# Altium PCB SensWear-V1R2-Debug.PcbDoc (part 3 of 3)
Units mm, origin at the board's own origin, x right, y up, seen from the top; angles counter-clockwise.
Board outline 25 x 25 mm, 4 copper layers (Top, L2, L3, Bottom), stack 1.582 mm thick; 73 components, 63 nets, 295 pads, 106 vias.
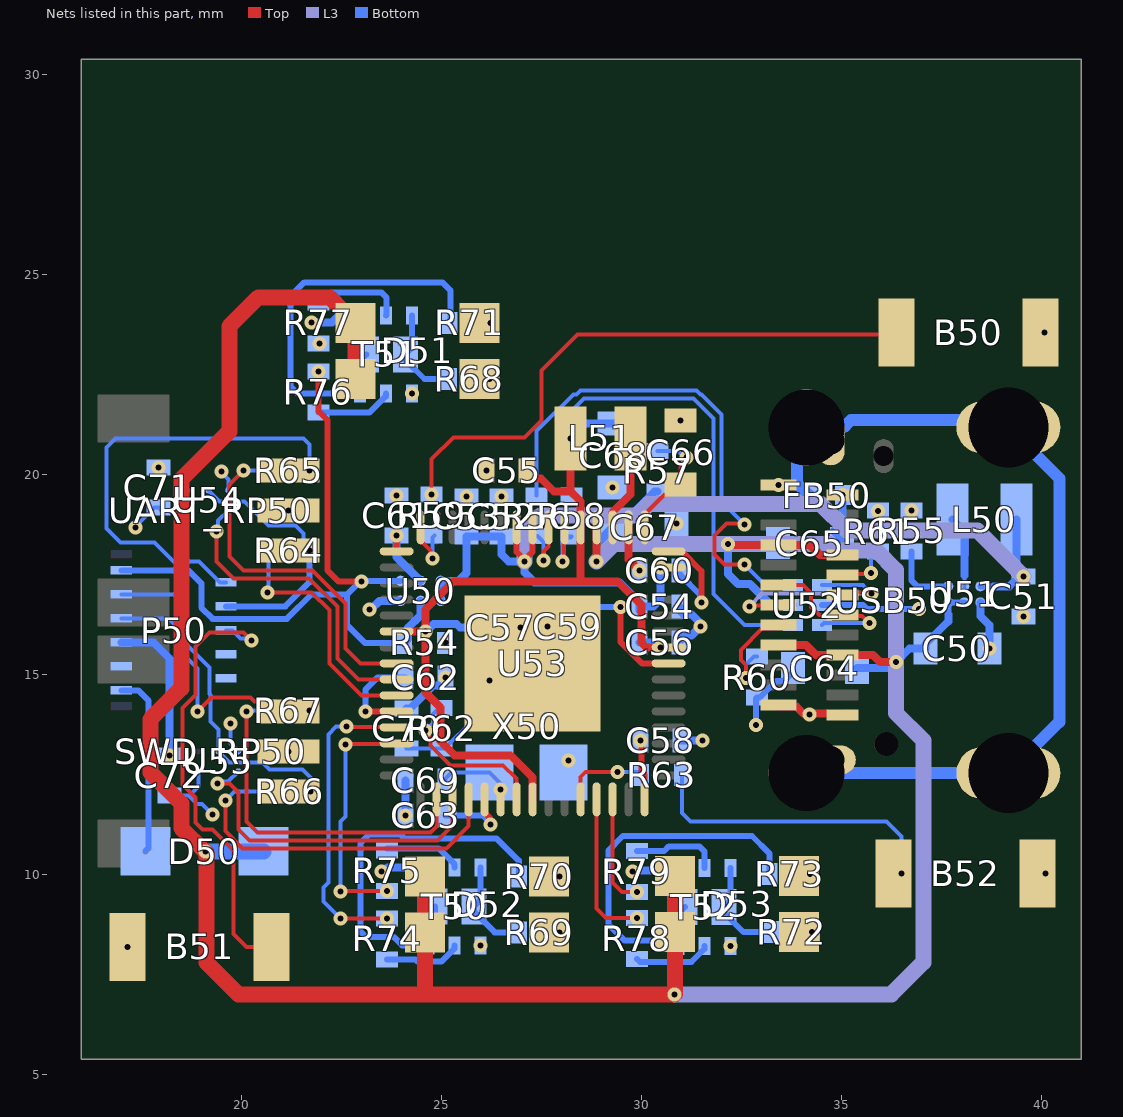
[diagram p4: the nets of this part, all layers, seen from the top]

## Part data (continued)
R59 R62 R63 R74 R75 R76 R77 R78 R79: library part ERJ-2RKF1001X, "RES SMD 1K OHM 1% 1/10W 0402", Manufacturer="Panasonic Electronic Components", Operating Temperature="-55°C ~ 155°C", Package / Case="0402 (1005 Metric)", Power (Watts)="0.1W, 1/10W", Resistance (Ohms)=1k, Supplier Device Package=0402, Supplier Part Number 1=P1.00KLDKR-ND, Temperature Coefficient=±100ppm/°C, Tolerance=±1%, Category=Resistors, ComponentLink1Description=https://industrial.panasonic.com/cdbs/www-data/pdf/RDA0000/AOA0000C283.pdf, ComponentLink1URL=https://industrial.panasonic.com/cdbs/www-data/pdf/RDA0000/AOA0000C283.pdf, Composition="Thick Film", Failure Rate=-, Features="Automotive AEC-Q200", Height - Seated (Max)="0.016\" (0.40mm)", Manufacturer Part Number=ERJ-2RKF1001X, Number of Terminations=2, Packaging=Digi-Reel®, Part Status=Active, Pricing 1="1=0.1, 10=0.025, 25=0.018, 50=0.0136, 100=0.01, 250=0.00764, 500=0.00612, 1000=0.00451, 5000=0.00323 (USD)", RoHS="RoHS Compliant", Size / Dimension="0.039\" L x 0.020\" W (1.00mm x 0.50mm)", Stock 1=5504027, Supplier 1=Digi-Key
R60 R61: library part ERJ-2RKF5101X, "RES SMD 5.1K OHM 1% 1/10W 0402", Case Code (Imperial)=0402, Case Code (Metric)=1005, Manufacturer=Panasonic, Max Operating Temperature=155°C, Max Power Dissipation=100mW, Min Operating Temperature=-55°C, Package Quantity=10000, Resistance Tolerance=1%, Resistor Type="Thick Film", Supplier Part Number=667-ERJ-2RKF5101X, Temperature Coefficient=100ppm/°C, Voltage Rating=50V, Case/Package=0402, Category="Chip SMD Resistors", ComponentLink1Description=https://datasheet.ciiva.com/11821/0900766b80f80784-11821351.pdf?src-supplier=Rs, ComponentLink1URL=https://datasheet.ciiva.com/11821/0900766b80f80784-11821351.pdf?src-supplier=Rs, ComponentLink2Description=https://datasheet.ciiva.com/43467/1678782-43467375.pdf?src-supplier=Farnell, ComponentLink2URL=https://datasheet.ciiva.com/43467/1678782-43467375.pdf?src-supplier=Farnell, ComponentLink3Description=https://datasheet.ciiva.com/16761/70260748-16761739.pdf?src-supplier=Allied+Electronics, ComponentLink3URL=https://datasheet.ciiva.com/16761/70260748-16761739.pdf?src-supplier=Allied+Electronics, ComponentLink4Description=https://datasheet.ciiva.com/16788/70260748-16788554.pdf?src-supplier=Allied+Electronics, ComponentLink4URL=https://datasheet.ciiva.com/16788/70260748-16788554.pdf?src-supplier=Allied+Electronics, ComponentLink5Description=https://datasheet.ciiva.com/9195/aoa0000ce2-9195580.pdf?src-supplier=Avnet, ComponentLink5URL=https://datasheet.ciiva.com/9195/aoa0000ce2-9195580.pdf?src-supplier=Avnet, Construction=Rectangular, Contact Plating=Tin, Depth=0.5mm, Height=0.35mm, Lead Free=5697LeadFree, Length=1mm, Manufacturer Part Number=ERJ-2RKF5101X, Military Standard=Not, Mounting Technology="Surface Mount", Number of Terminations=2, Packaging="Tape and Reel", Power Rating=100mW, Pricing="1=0.1, 10=0.016, 50=0.016, 100=0.009, 1000=0.007, 10000=0.004 (USD)", Reach SVHC Compliant=No, RoHS=Yes, RoHS Compliant=Yes, Series=ERJ, Stock=709989, Supplier=Mouser, Supplier 1=Mouser, Supplier Part Number 1=667-ERJ-2RKF5101X, Technology="THICK FILM", Termination=SMD/SMT, Tolerance=1%, Voltage Rating (DC)=50V, Weight=2.8E-05oz, Width=0.5mm
R64 R65 R66 R67: library part ERJ-2RKF1000X, "RES SMD 100 OHM 1% 1/10W 0402", Manufacturer="Panasonic Electronic Components", Operating Temperature="-55°C ~ 155°C", Package / Case="0402 (1005 Metric)", Power (Watts)="0.1W, 1/10W", Resistance (Ohms)=100, Supplier Device Package=0402, Supplier Part Number 1=P100LDKR-ND, Temperature Coefficient=±100ppm/°C, Tolerance=±1%, Category=Resistors, ComponentLink1Description=https://industrial.panasonic.com/cdbs/www-data/pdf/RDA0000/AOA0000C283.pdf, ComponentLink1URL=https://industrial.panasonic.com/cdbs/www-data/pdf/RDA0000/AOA0000C283.pdf, Composition="Thick Film", Failure Rate=-, Features="Automotive AEC-Q200", Height - Seated (Max)="0.016\" (0.40mm)", Manufacturer Part Number=ERJ-2RKF1000X, Number of Terminations=2, Packaging=Digi-Reel®, Part Status=Active, Pricing 1="1=0.1, 10=0.025, 25=0.018, 50=0.0136, 100=0.01, 250=0.00764, 500=0.00612, 1000=0.00451, 5000=0.00323 (USD)", RoHS="RoHS Compliant", Size / Dimension="0.039\" L x 0.020\" W (1.00mm x 0.50mm)", Stock 1=1714577, Supplier 1=Digi-Key
R68 R69 R70 R71 R72 R73: library part ERJ-2RKF6200X, "RES SMD 620 OHM 1% 1/10W 0402", Case Code (Imperial)=0402, Case Code (Metric)=1005, Manufacturer=Panasonic, Max Operating Temperature=155°C, Max Power Dissipation=100mW, Min Operating Temperature=-55°C, Package Quantity=10000, Resistance=620R, Supplier Part Number 1=P620LCT-ND, Temperature Coefficient=100ppm/°C, Tolerance=1%, Voltage Rating=50V, Case/Package=0402, ComponentLink1Description=https://datasheet.ciiva.com/11821/0900766b80f80784-11821345.pdf?src-supplier=RSComponents, ComponentLink1URL=https://datasheet.ciiva.com/11821/0900766b80f80784-11821345.pdf?src-supplier=RSComponents, ComponentLink2Description=https://datasheet.ciiva.com/46373/1678782-46373670.pdf?src-supplier=Element14, ComponentLink2URL=https://datasheet.ciiva.com/46373/1678782-46373670.pdf?src-supplier=Element14, ComponentLink3Description=https://datasheet.ciiva.com/46373/1678782-46373671.pdf?src-supplier=Element14, ComponentLink3URL=https://datasheet.ciiva.com/46373/1678782-46373671.pdf?src-supplier=Element14, ComponentLink4Description=https://datasheet.ciiva.com/22743/1678782-22743848.pdf?src-supplier=Farnell, ComponentLink4URL=https://datasheet.ciiva.com/22743/1678782-22743848.pdf?src-supplier=Farnell, ComponentLink5Description=https://datasheet.ciiva.com/7711/1678782-7711049.pdf?src-supplier=Element14, ComponentLink5URL=https://datasheet.ciiva.com/7711/1678782-7711049.pdf?src-supplier=Element14, ComponentLink6Description=https://datasheet.ciiva.com/16773/70260748-16773113.pdf?src-supplier=Allied+Electronics, ComponentLink6URL=https://datasheet.ciiva.com/16773/70260748-16773113.pdf?src-supplier=Allied+Electronics, ComponentLink7Description=https://datasheet.ciiva.com/30264/aoa0000ce2-30264139.pdf?src-supplier=Onlinecomponents.com, ComponentLink7URL=https://datasheet.ciiva.com/30264/aoa0000ce2-30264139.pdf?src-supplier=Onlinecomponents.com, ComponentLink8Description=https://datasheet.ciiva.com/22681/1678782-22681676.pdf?src-supplier=Element14, ComponentLink8URL=https://datasheet.ciiva.com/22681/1678782-22681676.pdf?src-supplier=Element14, ComponentLink9Description=https://datasheet.ciiva.com/43467/1678782-43467292.pdf?src-supplier=Farnell, ComponentLink9URL=https://datasheet.ciiva.com/43467/1678782-43467292.pdf?src-supplier=Farnell, ComponentLink10Description=https://datasheet.ciiva.com/24159/aoa0000ce2-24159919.pdf?src-supplier=Mouser, ComponentLink10URL=https://datasheet.ciiva.com/24159/aoa0000ce2-24159919.pdf?src-supplier=Mouser, ComponentLink11Description=https://datasheet.ciiva.com/28577/1694929-28577711.pdf?src-supplier=Element14, ComponentLink11URL=https://datasheet.ciiva.com/28577/1694929-28577711.pdf?src-supplier=Element14, Composition="Thick Film", Contact Plating=Tin, Depth=0.5mm, Features="Automotive AEC-Q200", Height=0.35mm, Lead Free="Lead Free", Length=1mm, Manufacturer Part Number=ERJ-2RKF6200X, Military Standard=Not, Mount="Surface Mount", Number of Terminations=2, Packaging="Tape and Reel", Power Rating=100mW, Pricing 1="1 = 0.10000, 10 = 0.04500, 100 = 0.01830, 1000 = 0.00823, 2500 = 0.00715, 5000 = 0.00590 (USD)", REACH SVHC="No SVHC", RoHS=Yes, Stock 1=3402, Supplier 1=Digi-Key, Termination=SMD/SMT, Voltage Rating (DC)=50V, Weight=2.8E-05oz, Width=0.02inch
SWD_RP50 UART_RP50: "Male Header, Pitch 1 mm, 1 x 3 Position, Height 2.9 mm, -25 to 85 degC, RoHS, Tape and Reel", Manufacturer=JST, Package Description="Male Header, Pitch 1 mm, 1 x 3 Position, Height 2.9 mm", Package Reference=SM03B-SRSS-TB, Supplier Part Number 1=306-SM03BSRSSTBLFSNP, Datasheet URL=https://datasheet.ciiva.com/26894/getdatasheetpartid-708885-26894671.pdf, Datasheet Version=11/2010, Manufacturer URL=http://www.jst.com/home2.html, Mounting Technology=SurfaceMount, No of Positions=3, Pitch=1mm, Style/Orientation=RightAngleHeader/Plug, Supplier 1=Mouser, Termination=Crimp, Type=ShroudedHeader
T50 T51 T52: "Transistor MOSFET Array Dual N-CH 30V 5A 6-Pin WSON T/R", Continuous Drain Current (ID)=5A, Drain to Source Breakdown Voltage=30V, Drain to Source Resistance=27mΩ, Gate to Source Voltage (Vgs)=20V, Input Capacitance=353pF, Manufacturer="Texas Instruments", Manufacturer Lifecycle Status=ACTIVE, Max Junction Temperature (Tj)=150°C, Max Power Dissipation=2.3W, Min Operating Temperature=-55°C, Supplier Part Number=296-48123-1-ND, Category=MOSFETs, ComponentLink1Description=https://octopart.com:443/opatz8j6/c1?t=jYUYnSIbX3JPF1ppKMk94jqLtnau3o2NkWkpxZkVqshdsPn2Xnsvg0CJDB2kaMHx6WQztfzcG0OekiWwH8J70MlJcI-durRh-GJOHOOmtd0RYM7KAe0wYEmFuAjLdnVjgqQAc6gT_hdsjRctdgH-iPW_2Oueiud6o-NrKtiJndFloCa3B1i_RQfED1okSLG4Xw8I11rLNwbzJXAm6ZYaBzMeR__geF93AX8ENApcPsw-JHHu80pvtQpIKkben9NFycDOxZ9-SIDOejWvJQ5QoARsnRm2j0JEHlnaXI5po2wZZsSibe2fDTedVPkJBoOEn9-npMFdctWhFQ_C1ahfTUFKBVMfUu-NE6M6aEw9sB_0tPZyMRgjg1CcOD-TVVJMv-7K8DIbU7U&src-supplier=Texas+Instruments, ComponentLink1URL=https://octopart.com:443/opatz8j6/c1?t=jYUYnSIbX3JPF1ppKMk94jqLtnau3o2NkWkpxZkVqshdsPn2Xnsvg0CJDB2kaMHx6WQztfzcG0OekiWwH8J70MlJcI-durRh-GJOHOOmtd0RYM7KAe0wYEmFuAjLdnVjgqQAc6gT_hdsjRctdgH-iPW_2Oueiud6o-NrKtiJndFloCa3B1i_RQfED1okSLG4Xw8I11rLNwbzJXAm6ZYaBzMeR__geF93AX8ENApcPsw-JHHu80pvtQpIKkben9NFycDOxZ9-SIDOejWvJQ5QoARsnRm2j0JEHlnaXI5po2wZZsSibe2fDTedVPkJBoOEn9-npMFdctWhFQ_C1ahfTUFKBVMfUu-NE6M6aEw9sB_0tPZyMRgjg1CcOD-TVVJMv-7K8DIbU7U&src-supplier=Texas+Instruments, ComponentLink2Description=https://datasheet.octopart.com:443/CSD87502Q2-Texas-Instruments-datasheet-61500092.pdf?src-supplier=Texas+Instruments, ComponentLink2URL=https://datasheet.octopart.com:443/CSD87502Q2-Texas-Instruments-datasheet-61500092.pdf?src-supplier=Texas+Instruments, ComponentLink3Description=https://datasheet.octopart.com:443/CSD87502Q2-Texas-Instruments-datasheet-153476664.pdf?src-supplier=Augswan, ComponentLink3URL=https://datasheet.octopart.com:443/CSD87502Q2-Texas-Instruments-datasheet-153476664.pdf?src-supplier=Augswan, ComponentLink4Description=https://datasheet.octopart.com:443/CSD87502Q2-Texas-Instruments-datasheet-169738626.pdf?src-supplier=LCSC, ComponentLink4URL=https://datasheet.octopart.com:443/CSD87502Q2-Texas-Instruments-datasheet-169738626.pdf?src-supplier=LCSC, ComponentLink5Description=http://sigma.octopart.com:80/reach_statement/Texas-Instruments-company-64.pdf?src-supplier=Compliance+Statements, ComponentLink5URL=http://sigma.octopart.com:80/reach_statement/Texas-Instruments-company-64.pdf?src-supplier=Compliance+Statements, ComponentLink6Description=http://sigma.octopart.com:80/conflict_mineral_statement/Texas-Instruments-company-63.pdf?src-supplier=Compliance+Statements, ComponentLink6URL=http://sigma.octopart.com:80/conflict_mineral_statement/Texas-Instruments-company-63.pdf?src-supplier=Compliance+Statements, Drain to Source Voltage (Vdss)=30V, Element Configuration=Dual, Height=800µm, Lead Free="Lead Free", Length=2mm, Lifecycle Status=Production, Manufacturer Part Number=CSD87502Q2, Max Operating Temperature=150°C, Mounting Technology="Surface Mount", Number of Channels=2, Packaging="Tape & Reel (TR)", Pins=6, Power Dissipation=2.3W, Pricing="1=0.51, 10=0.36, 25=0.3216, 100=0.2796, 250=0.25944, 500=0.24728, 1000=0.2373 (USD)", Rds On Max=32.4mΩ, RoHS=Compliant, Stock=34703, Supplier=DigiKey, Supplier 1=DigiKey, Supplier Part Number 1=296-48123-1-ND, Thickness=750µm, Turn-Off Delay Time=12ns, Turn-On Delay Time=3ns, Width=2mm
U50: "IC ADVANCED POWER SWITCH 6WLCSP", Current Limit=1.5A, Manufacturer="Fairchild Semiconductor", Operating Temperature="-40°C ~ 85°C", Package / Case="6-UFBGA, WLCSP", Supplier Device Package=6-WLCSP, Supplier Part Number 1=FPF1320UCXDKR-ND, Voltage - Input="1.5 V ~ 5.5 V", Category="Integrated Circuits (ICs)", ComponentLink1Description=http://www.fairchildsemi.com/ds/FP/FPF1320.pdf, ComponentLink1URL=http://www.fairchildsemi.com/ds/FP/FPF1320.pdf, Internal Switch(s)=Yes, Manufacturer Part Number=FPF1320UCX, Mounting Type="Surface Mount", Number of Outputs=1, Packaging=Digi-Reel®, Pricing 1="1=0.73, 10=0.636, 25=0.562, 100=0.4896, 250=0.42616, 500=0.36278, 1000=0.29057 (EUR)", Rds (On)="60 mOhm", RoHS="RoHS Compliant", Stock 1=1622, Supplier 1=Digi-Key, Type="High Side Switch"
U51: "Conv DC-DC 1.8V to 6.5V Synchronous Step Down Single-Out 1.8V to 3.3V 0.75A 6-Pin DSBGA T/R", Manufacturer="Texas Instruments", Supplier Part Number=595-TPS62840YBGR, Category="Voltage Regulators - Switching", Manufacturer Part Number=TPS62840YBGR, Pricing="1=1,97, 10=1,77, 50=1,77, 100=1,42, 1000=0,972, 10000=0,865 (USD)", RoHS=Yes, Stock=2271, Supplier=Mouser, Supplier 1=Mouser, Supplier Part Number 1=595-TPS62840YBGR
U52: library part PRTR5V0U2F,115, "TVS DIODE 5.5VWM SOT886", Capacitance @ Frequency="1pF @ 1MHz", Current - Peak Pulse (10/1000µs)=-, Manufacturer="NXP Semiconductors", Operating Temperature="-40°C ~ 85°C (TA)", Package / Case=6-XFDFN, Power Line Protection=Yes, Supplier Device Package="6-XSON, SOT886 (1.45x1)", Supplier Part Number 1=568-4677-6-ND, Voltage - Breakdown (Min)=6V, Voltage - Reverse Standoff (Typ)="5.5V (Max)", Applications=Automotive, Bidirectional Channels=2, Category="Circuit Protection", ComponentLink1Description=http://www.nxp.com/documents/data_sheet/PRTR5V0U2F_PRTR5V0U2K.pdf, ComponentLink1URL=http://www.nxp.com/documents/data_sheet/PRTR5V0U2F_PRTR5V0U2K.pdf, Manufacturer Part Number=PRTR5V0U2F,115, Mounting Type="Surface Mount", Packaging=Digi-Reel®, Part Status=Active, Power - Peak Pulse=-, Pricing 1="1=0.38, 10=0.325, 100=0.2427, 500=0.19058, 1000=0.14693 (GBP)", RoHS="RoHS Compliant", Stock 1=51030, Supplier 1=DigiKey, Supplier 2=RS, Supplier Part Number 2=8166931, Type="Steering (Rail to Rail)", Unidirectional Channels=-, Voltage - Clamping (Max) @ Ipp=-
U54 U55: "Schmitt Trigger 32mA 1 1.65V~5.5V 32mA 1 BGA-5 Buffer/Driver/Transceiver ROHS", Case/Package=BGA, High Level Output Current=-32mA, Low Level Output Current=32mA, Manufacturer="Texas Instruments", Manufacturer Lifecycle Status=ACTIVE, Max Operating Temperature=125°C, Max Supply Voltage=5.5V, Min Operating Temperature=-40°C, Min Supply Voltage=1.65V, Operating Supply Voltage=3.3V, Quiescent Current=1.5µA, Supplier Part Number=296-SN74LVC1G17YZPRCT-ND, Category="Buffers, Drivers and Transceivers", ComponentLink1Description=https://sigma.octopart.com:443/82288934/technical_drawing/Texas-Instruments-SN74LVC1G17YZPR.pdf?src-supplier=Texas+Instruments, ComponentLink1URL=https://sigma.octopart.com:443/82288934/technical_drawing/Texas-Instruments-SN74LVC1G17YZPR.pdf?src-supplier=Texas+Instruments, ComponentLink2Description=https://octopart.com:443/opatz8j6/c1?t=PyRarBsQ05LdiDhXNvU2f3oOqG1-bb7WCxWCMaxFTmsOtBRs7KjqXNp5sK_2d0llqty9KOIOP86L9m9F78mSvRKYKo43feLMx4OdbDLm-cZoL3aN5xX_-495hjOu7brVzsSaJqe0eM_P8AhVpHi5puBlhKbIrFeSrOCwHxcHWgi5PnhRUKZWtBRbK-25zEuCk6Jfi-bdFYgzu2MWub_x0O3lvfea8XTq7PdaVle1BtMyJ7Nv0Q4WJJSTRfTQuvPxk3b1_s4PYKQPF9FomEyeEEj8XMVdl7f4NPzizzEWK0FpT5uVNEEH98wbQrCFEjl8Ci9lfXN94WXBbZAYDLWqKcgI-0_yVWRTKmhI7HVloxJ-RsHHV951LAIPonwWLS7kB55M7FxHmQ&src-supplier=Texas+Instruments, ComponentLink2URL=https://octopart.com:443/opatz8j6/c1?t=PyRarBsQ05LdiDhXNvU2f3oOqG1-bb7WCxWCMaxFTmsOtBRs7KjqXNp5sK_2d0llqty9KOIOP86L9m9F78mSvRKYKo43feLMx4OdbDLm-cZoL3aN5xX_-495hjOu7brVzsSaJqe0eM_P8AhVpHi5puBlhKbIrFeSrOCwHxcHWgi5PnhRUKZWtBRbK-25zEuCk6Jfi-bdFYgzu2MWub_x0O3lvfea8XTq7PdaVle1BtMyJ7Nv0Q4WJJSTRfTQuvPxk3b1_s4PYKQPF9FomEyeEEj8XMVdl7f4NPzizzEWK0FpT5uVNEEH98wbQrCFEjl8Ci9lfXN94WXBbZAYDLWqKcgI-0_yVWRTKmhI7HVloxJ-RsHHV951LAIPonwWLS7kB55M7FxHmQ&src-supplier=Texas+Instruments, ComponentLink3Description=https://datasheet.octopart.com:443/SN74LVC1G17YZPR-Texas-Instruments-datasheet-25356049.pdf?src-supplier=Texas+Instruments, ComponentLink3URL=https://datasheet.octopart.com:443/SN74LVC1G17YZPR-Texas-Instruments-datasheet-25356049.pdf?src-supplier=Texas+Instruments, ComponentLink4Description=https://sigma.octopart.com:443/49258429/technical_drawing/Texas-Instruments-SN74LVC1G17YZPR.pdf?src-supplier=Texas+Instruments, ComponentLink4URL=https://sigma.octopart.com:443/49258429/technical_drawing/Texas-Instruments-SN74LVC1G17YZPR.pdf?src-supplier=Texas+Instruments, ComponentLink5Description=https://datasheet.octopart.com:443/SN74LVC1G17YZPR-Texas-Instruments-datasheet-13037214.pdf?src-supplier=Texas+Instruments, ComponentLink5URL=https://datasheet.octopart.com:443/SN74LVC1G17YZPR-Texas-Instruments-datasheet-13037214.pdf?src-supplier=Texas+Instruments, ComponentLink6Description=https://datasheet.octopart.com:443/SN74LVC1G17YZPR-Texas-Instruments-datasheet-10899358.pdf?src-supplier=Texas+Instruments, ComponentLink6URL=https://datasheet.octopart.com:443/SN74LVC1G17YZPR-Texas-Instruments-datasheet-10899358.pdf?src-supplier=Texas+Instruments, ComponentLink7Description=https://datasheet.octopart.com:443/SN74LVC1G17YZPR-Texas-Instruments-datasheet-10669839.pdf?src-supplier=Texas+Instruments, ComponentLink7URL=https://datasheet.octopart.com:443/SN74LVC1G17YZPR-Texas-Instruments-datasheet-10669839.pdf?src-supplier=Texas+Instruments, ComponentLink8Description=https://datasheet.octopart.com:443/SN74LVC1G17YZPR-Texas-Instruments-datasheet-152405.pdf?src-supplier=Texas+Instruments, ComponentLink8URL=https://datasheet.octopart.com:443/SN74LVC1G17YZPR-Texas-Instruments-datasheet-152405.pdf?src-supplier=Texas+Instruments, ComponentLink9Description=https://datasheet.octopart.com:443/SN74LVC1G17YZPR-Texas-Instruments-datasheet-151447.pdf?src-supplier=Texas+Instruments, ComponentLink9URL=https://datasheet.octopart.com:443/SN74LVC1G17YZPR-Texas-Instruments-datasheet-151447.pdf?src-supplier=Texas+Instruments, ComponentLink10Description=https://datasheet.octopart.com:443/SN74LVC1G17YZPR-Texas-Instruments-datasheet-10256894.pdf?src-supplier=Texas+Instruments, ComponentLink10URL=https://datasheet.octopart.com:443/SN74LVC1G17YZPR-Texas-Instruments-datasheet-10256894.pdf?src-supplier=Texas+Instruments, ComponentLink11Description=https://datasheet.octopart.com:443/SN74LVC1G17YZPR-Texas-Instruments-datasheet-21221582.pdf?src-supplier=HQonline, ComponentLink11URL=https://datasheet.octopart.com:443/SN74LVC1G17YZPR-Texas-Instruments-datasheet-21221582.pdf?src-supplier=HQonline, ComponentLink12Description=https://datasheet.octopart.com:443/SN74LVC1G17YZPR-Texas-Instruments-datasheet-164417656.pdf?src-supplier=SHENGYU+ELECTRONICS, ComponentLink12URL=https://datasheet.octopart.com:443/SN74LVC1G17YZPR-Texas-Instruments-datasheet-164417656.pdf?src-supplier=SHENGYU+ELECTRONICS, ComponentLink13Description=https://datasheet.octopart.com:443/SN74LVC1G17YZPR-Texas-Instruments-datasheet-65713482.pdf?src-supplier=Newark, ComponentLink13URL=https://datasheet.octopart.com:443/SN74LVC1G17YZPR-Texas-Instruments-datasheet-65713482.pdf?src-supplier=Newark, ComponentLink14Description=https://datasheet.octopart.com:443/SN74LVC1G17YZPR-Texas-Instruments-datasheet-62342808.pdf?src-supplier=Newark, ComponentLink14URL=https://datasheet.octopart.com:443/SN74LVC1G17YZPR-Texas-Instruments-datasheet-62342808.pdf?src-supplier=Newark, ComponentLink15Description=https://datasheet.octopart.com:443/SN74LVC1G17YZPR-Texas-Instruments-datasheet-14144602.pdf?src-supplier=iiiC, ComponentLink15URL=https://datasheet.octopart.com:443/SN74LVC1G17YZPR-Texas-Instruments-datasheet-14144602.pdf?src-supplier=iiiC, ComponentLink16Description=https://datasheet.octopart.com:443/SN74LVC1G17YZPR-Texas-Instruments-datasheet-11534093.pdf?src-supplier=Farnell, ComponentLink16URL=https://datasheet.octopart.com:443/SN74LVC1G17YZPR-Texas-Instruments-datasheet-11534093.pdf?src-supplier=Farnell, ComponentLink17Description=https://datasheet.octopart.com:443/SN74LVC1G17YZPR-Texas-Instruments-datasheet-10413188.pdf?src-supplier=Farnell, ComponentLink17URL=https://datasheet.octopart.com:443/SN74LVC1G17YZPR-Texas-Instruments-datasheet-10413188.pdf?src-supplier=Farnell, ComponentLink18Description=https://datasheet.octopart.com:443/SN74LVC1G17YZPR-Texas-Instruments-datasheet-530134.pdf?src-supplier=Farnell, ComponentLink18URL=https://datasheet.octopart.com:443/SN74LVC1G17YZPR-Texas-Instruments-datasheet-530134.pdf?src-supplier=Farnell, ComponentLink19Description=https://datasheet.octopart.com:443/SN74LVC1G17YZPR-Texas-Instruments-datasheet-24634.pdf?src-supplier=DigiKey, ComponentLink19URL=https://datasheet.octopart.com:443/SN74LVC1G17YZPR-Texas-Instruments-datasheet-24634.pdf?src-supplier=DigiKey, ComponentLink20Description=http://sigma.octopart.com:80/reach_statement/Texas-Instruments-company-64.pdf?src-supplier=Compliance+Statements, ComponentLink20URL=http://sigma.octopart.com:80/reach_statement/Texas-Instruments-company-64.pdf?src-supplier=Compliance+Statements, ComponentLink21Description=http://sigma.octopart.com:80/conflict_mineral_statement/Texas-Instruments-company-63.pdf?src-supplier=Compliance+Statements, ComponentLink21URL=http://sigma.octopart.com:80/conflict_mineral_statement/Texas-Instruments-company-63.pdf?src-supplier=Compliance+Statements, Contact Plating="Copper, Silver, Tin", Height=500µm, Lead Free="Lead Free", Length=1.75mm, Lifecycle Status=Production, Logic Function="Buffer, Schmitt Trigger", Manufacturer Part Number=SN74LVC1G17YZPR, Mounting Technology="Surface Mount", Number of Bits=1, Number of Bits per Element=1, Number of Channels=1, Number of Elements=1, Number of Gates=1, Number of Input Lines=1, Number of Inputs=1, Number of Output Lines=1, Number of Outputs=1, Packaging="Cut Tape", Pins=5, Polarity=Non-Inverting, Pricing="1=0.46, 10=0.325, 25=0.29, 100=0.2515, 250=0.2332, 500=0.22216, 1000=0.21307 (USD)", Propagation Delay=5ns, Radiation Hardening=No, REACH SVHC=No, RoHS=Compliant, Stock=4124, Supplier=DigiKey, Supplier 1=DigiKey, Supplier Part Number 1=296-SN74LVC1G17YZPRCT-ND, Termination=SMD/SMT, Thickness=310µm, Turn-On Delay Time=5ns, Width=1.25mm
USB50: "Cut Tape - Usb Type C Receptacle Mid Mnt Dual R", Current Rating=5A, Insulation Color=Black, Manufacturer="JAE Electronics", Max Operating Temperature=80°C, Min Operating Temperature=-30°C, Supplier Part Number 1=656-DX07S024JJ3R1300, Voltage Rating=20V, Category="USB Connectors", ComponentLink1Description=http://www.alliedelec.com/m/d/e03b7b5d71e2d3e369c52d5c8eaca2b6.pdf?src-supplier=Allied+Electronics, ComponentLink1URL=http://www.alliedelec.com/m/d/e03b7b5d71e2d3e369c52d5c8eaca2b6.pdf?src-supplier=Allied+Electronics, ComponentLink2Description=http://www.jae.com/z-en/pdf_download_exec.cfm?param=SJ115995.pdf&src-supplier=Digikey, ComponentLink2URL=http://www.jae.com/z-en/pdf_download_exec.cfm?param=SJ115995.pdf&src-supplier=Digikey, Connector Type=USB, Contact Material=153,157ConductorMaterial, Contact Plating=Gold, Gender=Receptacle, Height=3.29mm, Manufacturer Part Number=DX07S024JJ3R1300, Mating Cycles=10000, Mounting Technology="Surface Mount,Through Hole,Horizontal", Number of Contacts=24, Number of Ports=1, Packaging="Cut Tape", Pricing="1=1.78, 10=1.612, 25=1.5272, 50=1.4916, 100=1.4205, 250=1.25048 (USD)", RoHS=Yes, RoHS Compliant=Yes, Series=DX07, Shielding=Shielded, Stock=21875, Supplier 1=Mouser, Supplier 2=Digikey, Supplier Part Number 2=670-2846-1-ND, Termination=Solder
X50: library part ABM8-272-T3, "Parallel - Fundamental Quartz Crystal, 12MHz Nom", Frequency Stability=30ppm, Frequency Tolerance=0.003%, Load Capacitance=10pF, Manufacturer=Abracon, Max Operating Temperature=85°C, Min Operating Temperature=-40°C, Supplier Part Number=535-ABM8-272-T3CT-ND, Category=Crystals, ComponentLink1Description=https://datasheet.octopart.com:443/ABM8-272-T3-Abracon-datasheet-103059652.pdf?src-supplier=Electro+Sonic, ComponentLink1URL=https://datasheet.octopart.com:443/ABM8-272-T3-Abracon-datasheet-103059652.pdf?src-supplier=Electro+Sonic, ComponentLink2Description=http://sigma.octopart.com:80/conflict_mineral_statement/Abracon-company-27.pdf?src-supplier=Compliance+Statements, ComponentLink2URL=http://sigma.octopart.com:80/conflict_mineral_statement/Abracon-company-27.pdf?src-supplier=Compliance+Statements, ESR=50Ω, Frequency=12MHz, Harmonized Tariff Schedule (HTS) Code=8541.60.00.80, Introduction Date=2024-01-22, Lifecycle Status=Production, Manufacturer Part Number=ABM8-272-T3, Mounting Technology="Surface Mount", Pricing="1=0.54, 10=0.47, 25=0.4444, 50=0.4262, 100=0.4085, 250=0.38632, 500=0.37032, 1000=0.355 (USD)", REACH SVHC=Yes, RoHS=Compliant, Stock=2593, Supplier=DigiKey, Supplier 1=DigiKey, Supplier Part Number 1=535-ABM8-272-T3CT-ND

## Via types
v1: diameter 0.35, hole 0.15, Top to Bottom, tented both sides, 106 vias

## Nets (pads, with @x,y where several pads share a name; then routed paths per layer and width w, separated by ;. In a path a pad name is that pad's centre, name@x,y a point inside that pad or via, vN(x,y) a via of type N, cw(c..) or ccw(c..) an arc to the next point about the centre after c; other vN are vias at no path point)
1V1: C55.1 C56.1 C57.1 C68.2 L51.1 U53.6 U53.23 U53.39 U53.50 | length 23.2
  Top w0.2: U53.6@23.883,16.075 v1(24.608,16.075) ; C55.1@27.133,20.1 27.133,20 27.233,19.9 27.488,19.9 27.813,19.575 28.233,19.575 ; U53.23@27.283,11.875 27.283,12.425 26.733,12.975 25.334,12.975 24.983,13.326 24.983,14.171 24.608,14.546 v1(24.608,16.075) ; v1(28.233,20.9) 28.233,19.575 ; v1(30.483,15.675) 30.118,15.675 30.001,15.792 30.001,16.732 29.408,17.325 28.483,17.325 ; v1(24.608,16.075) 24.608,16.625 25.308,17.325 28.483,17.325 ; 28.233,19.575 28.483,19.325 U53.50@28.483,18.675 28.483,17.325
  Bottom w0.2: v1(24.608,16.075) 24.624,16.075 24.81,16.261 25.376,16.261 25.462,16.175 C57.1@25.983,16.175 ; v1(28.233,20.9) 28.608,21.275 C68.2@29.308,21.275 ; C56.1@29.958,15.8 30.317,15.8 30.442,15.675 v1(30.483,15.675)
1V8: P50.11 R54.1 R76.1 U50.B1 U50.C2 | length 17.9
  Top w0.15: v1(21.925,22.575) 21.925,21.585 22.15,21.36 22.15,17.6 22.425,17.325 v1(23,17.325)
  Bottom w0.15: P50.11@17,17.6 18.676,17.6 19.001,17.276 19.001,16.667 19.283,16.385 19.957,16.385 21.139,16.385 21.754,17 22.647,17 ; U50.C2@23.983,17.336 22.983,17.336 22.647,17 ; R54.1@24.073,15.786 23.089,15.786 22.647,16.228 22.647,17
  Bottom w0.2: R54.1@24.073,15.786 24.173,15.886 24.173,16.17 24.464,16.461 ; 24.483,16.461 24.464,16.461 ; U50.B1@24.483,16.836 24.483,16.48 24.464,16.461
3V3: C51.1 C52.2 C53.2 C54.2 L50.2 U50.A1 U50.A2 U51.A2 U53.44 U53.53 U53.54 | length 28.1
  Top w0.1: v1(27.083,17.825) v1@27.083,17.835
  Top w0.15: U53.54@26.883,18.675 26.883,18.063 27.083,17.863 v1(27.083,17.825) ; v1@27.083,17.863 27.283,18.063 U53.53@27.283,18.675
  L3 w0.4: v1(27.083,17.825) 27.083,18.583 27.475,18.975 29.904,18.975 30.184,19.255 34.488,19.255 35.143,18.6 38.4,18.6 v1(39.55,17.45)
  Bottom w0.15: U51.A2@38.475,17.2 38.8,17.2
  Bottom w0.2: U50.A1@24.983,16.836 U50.A2@24.983,17.336 25.433,17.336 25.633,17.536 C53.2@25.633,18.45 C52.2@26.508,18.45 26.508,18 26.683,17.825 v1(27.083,17.825) 27.083,17.55 27.333,17.3 29.458,17.3 C54.2@29.958,16.8 ; C54.2@29.958,16.6 C54.2@29.958,16.8 ; v1(30.483,17.675) 30.483,16.875 30.308,16.7 C54.2@29.958,16.7 C54.2@29.958,16.8 ; 38.8,17.2 39.2,17.2 39.45,17.45 v1(39.55,17.45) 39.475,17.45 39.375,17.55 L50.2@39.375,18.875
CC1: R60.1 USB50.A5 | length 3
  Top w0.1: v1(32.615,14.905) 32.615,15.23 32.49,15.355 32.49,15.613 33.022,16.145 33.34,16.145 USB50.A5@33.425,16.23 USB50.A5@33.11,16.23
  Bottom w0.1: v1(32.615,14.905) 32.615,15.24 32.815,15.44 R60.1@32.89,15.44
CC2: R61.1 USB50.B5 | length 1.4
  Top w0.1: USB50.B5@35.025,17.48 35.05,17.505 35.715,17.505 v1(35.74,17.53)
  Bottom w0.1: v1(35.74,17.53) 35.74,17.92 35.89,18.07 R61.1@35.915,18.07
CHG_AC: D50.1 P50.1 | length 4.6
  Bottom w0.15: P50.1@17,14.6 17.425,14.6 17.675,14.35 17.675,10.65 D50.1@17.6,10.575
D_N: U52.3 USB50.A7 USB50.B7 | length 4.1
  Top w0.1: USB50.A7@33.425,17.23 34.04,17.23 34.24,17.03 34.24,16.689 34.449,16.48 USB50.B7@35.025,16.48 35.05,16.455 35.518,16.455 35.688,16.284 v1(35.701,16.284)
  Bottom w0.1: U52.3@34.515,16.23 34.569,16.284 v1(35.701,16.284)
D_P: U52.1 USB50.A6 USB50.B6 | length 6
  Top w0.1: v1(32.7,16.7) 32.715,16.715 33.41,16.715 USB50.A6@33.425,16.73 ; USB50.B6@35.025,16.98 35.089,17.044 35.728,17.044 v1(35.752,17.021)
  L3 w0.1: v1(32.7,16.7) 33.021,17.021 v1(35.752,17.021)
  Bottom w0.1: U52.1@34.515,17.23 35.536,17.23 35.745,17.021 v1(35.752,17.021)
GND: B50.1 B51.1 B52.1 C50.1 C51.2 C52.1 C53.1 C54.1 C55.2 C56.2 C57.2 C58.2 C59.2 C60.2 C61.2 C62.2 C63.2 C64.1 C65.1 C66.1 C67.1 C68.1 C69.1 C70.1 C71.2 C72.2 FB50.1 P50.5 R54.2 R55.1 R60.2 R61.2 SWD_RP50.2 T50.1 T50.4 T51.1 T51.4 T52.1 T52.4 U50.C1 U51.A1 U52.2 U53.47 U53.61 U54.C1 U55.C1 UART_RP50.2 USB50.A1 USB50.A12 USB50.B1 USB50.B12 X50.2 X50.4 | length 24.1
  Top w0.15: USB50.A1@33.415,14.17 33.44,14.195 USB50.A1@33.46,14.195
  Top w0.2: U53.47@29.683,18.675 29.683,17.875 v1(29.958,17.6) ; USB50.A1@33.425,14.23 33.46,14.195 33.875,14.195 34.055,14.015 34.99,14.015 USB50.B12@35.025,13.98
  Bottom w0.1: v1(19.5,20.075) 19.5,20.05 19.675,19.875 U54.C1@19.675,19.6 ; v1(19.725,13.775) 19.725,13.275 U55.C1@19.925,13.075
  Bottom w0.15: v1(32.865,13.73) 32.865,14.395 R60.2@32.89,14.42 32.965,14.42 33.375,14.83 33.565,14.83 33.79,15.055 C64.1@33.79,15.155 ; U52.2@34.515,16.73 35.548,16.73 35.644,16.634 36.936,16.634 v1(36.94,16.63)
  Bottom w0.2: P50.5@17,15.8 17.8,15.8 18.2,15.4 v1(18.2,12.975) ; v1@21.8,23.8 22.269,23.8 22.443,23.975 T51.4@22.962,23.975 ; v1(23.2,16.625) 23.241,16.625 23.452,16.836 U50.C1@23.983,16.836 ; v1@23.525,10.05 23.65,10.175 T50.4@24.685,10.175 ; v1(24.108,11.475) C69.1@24.108,12.35 ; C70.1@24.133,14.15 24.233,14.15 24.808,14.725 25.008,14.725 25.108,14.825 v1(25.108,14.925) ; v1@29.8,10.1 30.875,10.1 30.925,10.15 T52.4@30.925,10.158 ; C56.2@30.958,15.8 30.958,15.87 31.058,15.97 31.253,15.97 v1(31.483,16.2) 31.454,16.229 31.454,16.304 31.258,16.5 31.058,16.5 30.958,16.6 C54.1@30.958,16.7 ; C58.2@30.983,13.35 v1(31.525,13.35) ; C65.1@34.815,18.58 C65.1@35.015,18.38 ; C65.1@35.015,18.28 35.025,18.29 35.025,19.415 FB50.1@35.09,19.48 v1(35.025,19.48) ; U51.A1@38.475,16.8 38.475,16.455 38.7,16.23 v1(38.7,15.65)
  other v1: 17.158,8.188 25.985,8.225 32.225,8.208 40.1,10.025 23.5,10.075 29.775,10.075 28.183,12.85 21.175,13.075 34.2,14 26.208,14.85 25.1,15.8 26.983,16.175 27.658,16.2 39.55,16.45 30.875,18.775 35.915,19.08 36.75,19.095 21.175,19.1 25.633,19.45 26.508,19.45 23.883,19.475 29.283,19.675 33.425,19.73 26.133,20.1 17.925,20.175 30.983,21.35 24.262,22.025 40.075,23.55 21.75,23.8
LED_SWD_GREEN: R78.1 U53.27 | length 3.8
  Top w0.1: U53.27@28.883,11.875 28.883,9.142 29.117,8.908 v1(29.887,8.908)
LED_SWD_RED: R79.1 U53.28 | length 2.8
  Top w0.1: U53.28@29.283,11.875 29.283,9.792 29.512,9.563 v1(29.887,9.563)
LED_UART_GREEN: R74.1 U53.12 | length 7.8
  Top w0.1: v1@22.48,8.895 v1(23.648,8.895) ; v1(22.625,13.7) 22.637,13.688 23.87,13.688 U53.12@23.883,13.675
  Bottom w0.1: v1(22.475,8.9) 22.05,9.325 22.05,9.675 22.175,9.8 22.175,13.5 22.37,13.695 22.62,13.695 v1(22.625,13.7)
LED_UART_RED: R75.1 U53.13 | length 6.2
  Top w0.1: v1@22.455,9.58 v1(23.648,9.58) ; v1(22.6,13.25) 22.613,13.263 23.87,13.263 U53.13@23.883,13.275
  Bottom w0.1: v1(22.475,9.575) 22.475,11.326 22.6,11.451 v1(22.6,13.25)
MCU_R\E\S\E\T\: B51.2 P50.6 | length 11.5
  Top w0.1: v1(20.25,15.85) 20.05,16.05 19.2,16.05 18.85,15.7 18.85,14.485 18.525,14.16 18.525,12.246 18.85,11.921 18.85,11.3 19.025,11.125 19.275,11.125 19.8,10.6 19.8,8.513 20.125,8.188 B51.2@20.758,8.188
  Bottom w0.1: P50.6@19.62,16.1 19.775,16.1 19.985,15.89 20.21,15.89 v1(20.25,15.85)
MCU_RX: P50.10 R65.1 UART_RP50.1 | length 11.5
  Bottom w0.1: P50.10@19.62,17.3 19.465,17.3 18.94,17.825 18.3,17.825 17.825,18.3 16.975,18.3 16.625,18.65 16.625,20.675 16.85,20.9 21.55,20.9 21.7,20.75 v1(21.7,20.1)
MCU_SWD_CLK: P50.7 R67.1 SWD_RP50.1 | length 6.4
  Top w0.1: v1(18.9,14.075) 19.25,14.425 20.235,14.425 20.335,14.325 20.925,14.325 SWD_RP50.1@21.175,14.075
  Bottom w0.1: P50.7@17,16.4 18.175,16.4 18.375,16.2 18.375,15.675 18.9,15.15 v1(18.9,14.075)
  other v1: 21.7,14.1
MCU_SWD_IO: P50.9 R66.1 SWD_RP50.3 U55.B1 | length 8.6
  Bottom w0.1: P50.9@17,17 18.35,17 18.575,16.775 18.575,15.8 19.205,15.17 19.205,14.503 19.225,14.483 19.225,13.815 19.425,13.615 U55.B1@19.425,13.075 19.7,12.8 20.532,12.8 20.707,12.625 21.525,12.625 21.725,12.425 v1(21.725,12.075)
MCU_TX: P50.8 R64.1 U54.B1 UART_RP50.3 | length 6.4
  Bottom w0.1: U54.B1@19.175,19.6 19.45,19.325 20.075,19.325 20.675,18.725 21.35,18.725 21.55,18.525 21.55,18.25 v1(21.7,18.1)
  Bottom w0.15: P50.8@19.62,16.7 21.1,16.7 21.7,17.3 v1(21.7,18.1)
MPU_R\E\S\E\T\: P50.4
MPU_SWD_CLK: P50.2
MPU_SWD_DIO: P50.3
NetB52_2: B52.2 R63.1 | length 7.6
  Bottom w0.1: R63.1@31.018,12.486 31.018,11.532 31.225,11.325 36.125,11.325 36.5,10.95 v1(36.5,10.025)
NetC66_2: C66.2 R57.2 U53.46 | length 3.1
  Top w0.1: U53.46@30.083,18.675 30.083,19 30.583,19.5 30.733,19.5 C66.2@30.983,19.75 30.983,20.221 31.133,20.371 v1(31.133,20.425)
  Bottom w0.1: R57.2@30.408,20.585 30.919,20.585 31.079,20.425 v1(31.133,20.425)
NetC69_2: C69.2 U53.21 X50.3 | length 1.6
  Bottom w0.1: C69.2@25.108,12.35 25.108,12.4 25.258,12.55 X50.3@26.208,12.55 X50.3@26.483,12.275
  other v1: 26.483,12.125
NetC70_2: C70.2 R62.1 X50.1 | length 4.7
  Bottom w0.1: C70.2@24.133,13.15 24.998,13.15 R62.1@25.008,13.14 25.083,13.14 25.818,13.875 27.183,13.875 28.058,14.75 X50.1@28.058,14.85
NetD51_3: D51.3 R68.2
  other v1: 26.21,22.383
NetD51_4: D51.4 R71.2
  other v1: 26.225,23.783
NetD52_3: D52.3 R69.2
  other v1: 27.958,8.55
NetD52_4: D52.4 R70.2
  other v1: 27.958,9.95
NetD53_3: D53.3 R72.2
  other v1: 34.272,8.558
NetD53_4: D53.4 R73.2
  other v1: 34.222,10.008
NetFB50_2: FB50.2 USB50.S1 USB50.S2 USB50.S3 USB50.S4 | length 22.1
  Bottom w0.3: USB50.S1@34.125,12.535 USB50.S3@39.175,12.535 40.45,13.81 40.45,19.9 USB50.S4@39.175,21.175 38.995,21.355 35.24,21.355 35.087,21.202 34.92,21.202 34.735,21.017 USB50.S2@34.735,20.85 ; FB50.2@34.19,19.48 33.89,19.78 33.89,20.94 USB50.S2@34.125,21.175 USB50.S2@34.735,21.175
NetL50_1: L50.1 U51.B2 | length 1.8
  Bottom w0.1: U51.B2@38.075,17.2 38.075,17.475
  Bottom w0.2: L50.1@37.775,18.875 38.075,18.575 38.075,17.475
NetL51_2: L51.2 U53.48 | length 2.4
  Top w0.2: U53.48@29.283,18.675 29.283,19.05 29.733,19.5 L51.2@29.733,20.9
NetR55_2: R55.2 U51.C2 | length 1.7
  Bottom w0.15: R55.2@36.75,18.075 36.75,17.35 36.9,17.2 U51.C2@37.675,17.2
NetR56_1: R56.1 U53.52 | length 1.8
  Top w0.1: v1(27.558,17.843) 27.571,17.856 27.571,18.089 27.683,18.2 27.683,18.909 U53.52@27.66,18.932
  Bottom w0.1: R56.1@27.383,18.455 27.408,18.455 27.558,18.305 v1@27.558,17.868
NetR58_1: R58.1 U53.51 | length 1.7
  Top w0.1: v1(28.033,17.825) 28.064,17.856 28.064,18.656 U53.51@28.083,18.675
  Bottom w0.1: v1(28.033,17.825) 28.033,18.3 28.183,18.45 R58.1@28.258,18.45 R58.1@28.233,18.425
NetR59_2: R59.2 U53.60 | length 1.6
  Top w0.1: U53.60@24.437,18.925 U53.60@24.483,18.879 ; U53.60@24.483,18.675 24.483,18.35 24.735,18.098 24.735,17.948 v1(24.783,17.9)
  Bottom w0.1: v1(24.783,17.9) 24.783,18.425 R59.2@24.833,18.475
NetR62_2: R62.2 U53.22 | length 4.2
  Top w0.1: v1(24.608,13.6) 24.608,13.541 24.733,13.416 24.733,13.223 25.231,12.725 26.548,12.725 26.883,12.39 U53.22@26.883,11.875
  Bottom w0.1: v1(24.608,13.6) 24.795,13.787 24.795,14.01 24.945,14.16 R62.2@25.008,14.16
NetR63_2: R63.2 U53.26 | length 2.2
  Top w0.1: U53.26@28.483,11.875 28.483,12.436 28.608,12.561 v1(29.408,12.561)
  Bottom w0.1: v1(29.408,12.561) 29.923,12.561 R63.2@29.998,12.486
NetR68_1: R68.1 T51.6 T51.7 | length 2.5
  Bottom w0.15: T51.6@24.262,23.975 24.262,23.162 T51.7@24.1,23 24.1,22.862 24.579,22.383 R68.1@25.19,22.383
NetR69_1: R69.1 T50.6 T50.7 | length 2.5
  Bottom w0.15: T50.6@25.985,10.175 25.985,9.362 T50.7@25.823,9.2 25.823,9.062 26.335,8.55 R69.1@26.938,8.55
NetR70_1: R70.1 T50.3 T50.8 | length 9.8
  Bottom w0.15: T50.8@24.847,9.2 24.847,8.462 24.685,8.3 T50.3@24.685,8.225 24.02,8.225 23.808,8.437 23.113,8.437 22.975,8.575 22.975,10.775 23.2,11 23.835,11 23.97,11 24.07,10.9 26.378,10.9 26.938,10.34 R70.1@26.938,9.95
NetR71_1: R71.1 T51.3 T51.8 | length 10.2
  Bottom w0.15: T51.8@23.124,23 22.962,22.838 T51.3@22.962,22.025 21.4,22.025 21.225,22.2 21.225,24.45 21.575,24.8 25.025,24.8 25.225,24.6 25.225,23.803 R71.1@25.205,23.783
NetR72_1: R72.1 T52.6 T52.7 | length 2.6
  Bottom w0.15: T52.6@32.225,10.158 32.225,9.345 T52.7@32.063,9.183 32.063,9.046 32.55,8.558 R72.1@33.252,8.558
NetR73_1: R73.1 T52.3 T52.8 | length 9.8
  Bottom w0.15: T52.8@31.087,9.183 30.925,9.021 T52.3@30.925,8.208 30.925,8.275 30.85,8.35 29.575,8.35 29.175,8.75 29.175,10.594 29.539,10.958 30.234,10.958 32.767,10.958 33.202,10.523 R73.1@33.202,10.008
NetR74_2: R74.2 T50.2 | length 1.9
  Bottom w0.15: R74.2@23.648,7.875 24.353,7.875 24.403,7.825 24.463,7.825 24.907,7.825 25.01,7.825 25.335,8.15 T50.2@25.335,8.225
NetR75_2: R75.2 T50.5 | length 1.9
  Bottom w0.15: R75.2@23.648,10.65 24.935,10.65 25.335,10.25 T50.5@25.335,10.175
NetR76_2: R76.2 T51.2 | length 1.9
  Bottom w0.15: R76.2@21.925,21.548 23.21,21.548 23.612,21.95 T51.2@23.612,22.025
NetR77_2: R77.2 T51.5 | length 2.3
  Bottom w0.15: R77.2@21.925,24.293 22,24.293 22.257,24.55 23.5,24.55 23.625,24.425 23.625,23.988 T51.5@23.612,23.975
NetR78_2: R78.2 T52.2 | length 1.9
  Bottom w0.15: R78.2@29.887,7.888 29.967,7.808 30.702,7.808 31.147,7.808 31.25,7.808 31.575,8.133 T52.2@31.575,8.208
NetR79_2: R79.2 T52.5 | length 2.2
  Bottom w0.15: R79.2@29.887,10.583 30.573,10.583 30.689,10.7 31.45,10.7 31.575,10.575 T52.5@31.575,10.158
T_SWD_CLK: R67.2 U53.17 | length 8.9
  Top w0.1: v1(20.125,14.075) 20.125,11.325 20.4,11.05 24.733,11.05 24.883,11.2 U53.17@24.883,11.875
  Bottom w0.1: v1@20.1,14.1 R67.2@20.68,14.1
T_SWD_IO: R66.2 U53.19 | length 9.1
  Top w0.1: v1(19.6,11.85) 19.6,11.083 20.033,10.65 25.125,10.65 25.683,11.208 U53.19@25.683,11.875
  Bottom w0.1: v1@19.625,11.875 19.825,12.075 R66.2@20.705,12.075
T_SWD_IO_FLT: U53.18 U55.C2 | length 8.5
  Top w0.1: v1(19.4,12.275) 19.7,12.275 19.925,12.05 19.925,11.125 20.2,10.85 24.908,10.85 25.283,11.225 U53.18@25.283,11.875
  Bottom w0.1: v1(19.4,12.275) 19.44,12.315 19.665,12.315 U55.C2@19.925,12.575
T_UART_RX: R64.2 U53.10 | length 6.2
  Top w0.1: v1(20.65,17.05) 21.759,17.05 22.2,16.609 22.2,15.275 23,14.475 U53.10@23.883,14.475
  Bottom w0.1: v1@20.675,17 20.68,17.005 R64.2@20.68,18.1
T_UART_RX_FLT: U53.9 U54.C2 | length 7.9
  Top w0.1: v1(19.375,18.575) 19.375,17.825 19.8,17.4 21.692,17.4 22.4,16.692 22.4,15.4 22.925,14.875 U53.9@23.883,14.875
  Bottom w0.1: v1(19.375,18.575) 19.415,18.615 19.415,18.84 U54.C2@19.675,19.1
T_UART_TX: R65.2 U53.8 | length 8.9
  Top w0.1: v1(20.05,20.1) 19.7,19.75 19.7,17.95 20.05,17.6 21.775,17.6 22.6,16.775 22.6,15.65 22.975,15.275 U53.8@23.883,15.275
  Bottom w0.1: v1(20.05,20.1) R65.2@20.68,20.1
USB_BOOT_SEL: B50.2 R59.1 | length 14.6
  Top w0.1: v1(24.758,19.495) 24.758,20.383 25.3,20.925 27.075,20.925 27.5,21.35 27.5,22.6 28.4,23.5 36.425,23.5 B50.2@36.475,23.55
USB_D_N: R58.2 U52.4 | length 13.1
  Bottom w0.1: 27.908,21.25 27.908,20.625 28.258,20.275 R58.2@28.258,19.47 R58.2@28.333,19.47 ; 27.916,21.249 28.567,21.9 31.3,21.9 31.8,21.4 31.8,17.004 32.574,16.23 U52.4@33.79,16.23
USB_D_P: R56.2 U52.6 | length 13.5
  Top w0.1: v1(32.575,17.75) 32.075,17.75 31.825,18 31.825,18.475 32.125,18.775 32.55,18.775 v1(32.575,18.75)
  Bottom w0.1: R56.2@27.383,19.475 27.383,21.083 28.3,22 28.384,22 28.484,22.1 31.383,22.1 31.483,22 31.5,22 32,21.5 32,19.325 32.326,18.999 v1(32.575,18.75) ; v1(32.575,17.75) 32.575,17.749 33.094,17.23 U52.6@33.79,17.23
V_SYS: C50.2 C64.2 C65.2 C67.2 D50.2 D51.1 D51.2 D52.1 D52.2 D53.1 D53.2 R57.1 U51.B1 U51.C1 U52.5 U53.49 USB50.A4 USB50.A9 USB50.B4 USB50.B9 | length 83.6
  Top w0.2: v1(28.883,17.825) U53.49@28.883,18.675 ; v1(32.165,18.255) 32.19,18.23 USB50.A9@33.425,18.23 34.215,18.23 34.465,17.98 USB50.B4@35.025,17.98 ; USB50.A4@33.425,15.73 34.115,15.73 34.365,15.48 USB50.B9@35.025,15.48 35.79,15.48 35.965,15.305 v1(36.365,15.305)
  Top w0.4: D51.1@22.85,22.383 D51.2@22.85,23.783 22.55,24.083 22.208,24.425 20.425,24.425 19.7,23.7 19.7,21.075 18.5,19.875 18.5,14.65 17.725,13.875 17.725,12.551 18.5,11.776 18.5,11.155 19.08,10.575 v1(19.1,10.575) 19.125,10.55 19.125,7.8 19.925,7 24.596,7 ; D52.2@24.598,9.95 D52.1@24.598,8.55 24.598,7.002 24.596,7 ; D53.1@30.837,8.558 D53.2@30.837,9.958 ; D53.1@30.839,8.556 30.839,7.014 v1(30.825,7) 24.596,7
  L3 w0.4: v1(28.883,17.825) 29.313,18.255 v1(32.165,18.255) 34.714,18.255 34.869,18.1 35.87,18.1 36.365,17.605 v1(36.365,15.305) 36.365,14.033 37.05,13.348 37.05,7.8 36.25,7 v1(30.825,7)
  Bottom w0.15: 37.675,16.5 U51.C1@37.675,16.8 U51.B1@38.075,16.8
  Bottom w0.2: v1(28.883,17.825) 28.883,17.866 29.083,18.066 29.083,18.475 C67.2@29.283,18.675 29.283,18.775 29.483,18.975 29.743,18.975 30.333,19.565 R57.1@30.408,19.565 ; v1(32.165,18.255) v1@32.165,18.223 ; C65.2@33.415,18.28 32.222,18.28 v1@32.165,18.223 ; U52.5@33.79,16.73 33.24,16.73 32.715,17.255 32.415,17.255 32.165,17.505 v1@32.165,18.223 ; C64.2@35.39,15.155 36.174,15.155 36.324,15.305 v1(36.365,15.305) 36.71,15.65 C50.2@37.1,15.65 37.1,15.75 37.675,16.325 37.675,16.5
  Bottom w0.4: v1(19.1,10.575) D50.2@20.55,10.575
VDDIO: C58.1 C59.1 C60.1 C61.1 C62.1 C63.1 C71.1 C72.1 R77.1 U50.B2 U53.1 U53.11 U53.20 U53.30 U53.38 U53.45 U54.A2 U55.A2 | length 17.6
  Top w0.15: v1(23.108,14.075) U53.11@23.883,14.075 ; U53.1@23.883,18.075 v1(23.883,18.475) ; U53.20@26.083,11.875 26.083,11.536 26.22,11.4 26.22,11.288 v1@26.258,11.25 ; v1(29.483,16.686) 29.483,15.804 30.012,15.275 U53.38@30.683,15.275 ; v1(29.983,13.35) 30.003,13.33 30.003,12.58 30.083,12.5 30.083,12.361 U53.30@30.083,11.875 ; U53.45@30.683,18.075 31.008,18.075 31.5,17.583 v1(31.5,16.8)
  Bottom w0.1: v1(17.35,18.675) 17.35,18.7 17.825,19.175 C71.1@17.925,19.175 18,19.1 U54.A2@18.675,19.1 ; C72.1@18.2,11.975 18.675,11.975 18.889,11.761 19.014,11.761 v1(19.275,11.5) ; 18.7,11.975 18.925,12.2 U55.A2@18.925,12.575
  Bottom w0.15: v1(23.108,14.075) 23.108,14.625 23.408,14.925 C62.1@24.108,14.925 ; C63.1@25.108,11.475 26.033,11.475 v1@26.258,11.25 ; C59.1@28.658,16.2 28.658,16.587 28.757,16.686 v1(29.483,16.686) ; C60.1@30.958,17.6 30.958,17.5 31.462,16.996 31.462,16.838 v1(31.5,16.8)
  Bottom w0.2: v1(23.883,18.475) 23.883,17.936 U50.B2@24.483,17.336
  other v1: 26.233,11.25 21.95,23.275
pads on no net: P50.P1 P50.P2 SWD_RP50.MP1 SWD_RP50.MP2 U53.2 U53.3 U53.4 U53.5 U53.7 U53.14 U53.15 U53.16 U53.24 U53.25 U53.29 U53.31 U53.32 U53.33 U53.34 U53.35 U53.36 U53.37 U53.40 U53.41 U53.42 U53.55 U53.56 U53.57 U53.58 U53.59 U54.A1 U55.A1 UART_RP50.MP1 UART_RP50.MP2 USB50. USB50.A2 USB50.A3 USB50.A8 USB50.A10 USB50.A11 USB50.B2 USB50.B3 USB50.B8 USB50.B10 USB50.B11

## Polygon pours and split planes (outlines as drawn)
VDDIO on L3 "VDDIO_PLANE" (solid, remove dead copper, pour order 0): 16,30 41,30 41,5 16,5
GND on L2 "GND_PLANE" (solid, pour order 1): 16,30 41,30 41,5 16,5

## Other copper
Top:
  region net NetFB50_2: 34.738,20.125 ccw(c34.738,20.675) 35.275,20.555 35.275,21.175 ccw(c34.675,21.175) 34.675,21.775 33.575,21.775 ccw(c33.575,21.175) 33.575,20.575 34.175,20.575 ccw(c34.716,20.675) 34.725,20.125 ccw(c34.738,20.676)
  region net NetFB50_2: 35.275,12.535 35.275,13.155 ccw(c34.738,13.035) 34.738,13.585 ccw(c34.738,13.052) 34.725,13.585 ccw(c34.716,13.035) 34.175,13.135 33.575,13.135 ccw(c33.575,12.535) 32.975,12.535 ccw(c33.575,12.535) 33.575,11.935 34.675,11.935 ccw(c34.675,12.535)
L2:
  region net NetFB50_2: 34.738,20.125 ccw(c34.738,20.675) 35.275,20.555 35.275,21.175 ccw(c34.675,21.175) 34.675,21.775 33.575,21.775 ccw(c33.575,21.175) 33.575,20.575 34.175,20.575 ccw(c34.716,20.675) 34.725,20.125 ccw(c34.738,20.676)
  region net NetFB50_2: 35.275,12.535 35.275,13.155 ccw(c34.738,13.035) 34.738,13.585 ccw(c34.738,13.052) 34.725,13.585 ccw(c34.716,13.035) 34.175,13.135 33.575,13.135 ccw(c33.575,12.535) 32.975,12.535 ccw(c33.575,12.535) 33.575,11.935 34.675,11.935 ccw(c34.675,12.535)
L3:
  region net NetFB50_2: 34.738,20.125 ccw(c34.738,20.675) 35.275,20.555 35.275,21.175 ccw(c34.675,21.175) 34.675,21.775 33.575,21.775 ccw(c33.575,21.175) 33.575,20.575 34.175,20.575 ccw(c34.716,20.675) 34.725,20.125 ccw(c34.738,20.676)
  region net NetFB50_2: 35.275,12.535 35.275,13.155 ccw(c34.738,13.035) 34.738,13.585 ccw(c34.738,13.052) 34.725,13.585 ccw(c34.716,13.035) 34.175,13.135 33.575,13.135 ccw(c33.575,12.535) 32.975,12.535 ccw(c33.575,12.535) 33.575,11.935 34.675,11.935 ccw(c34.675,12.535)
Bottom:
  region net NetFB50_2: 34.738,20.125 ccw(c34.738,20.675) 35.275,20.555 35.275,21.175 ccw(c34.675,21.175) 34.675,21.775 33.575,21.775 ccw(c33.575,21.175) 33.575,20.575 34.175,20.575 ccw(c34.716,20.675) 34.725,20.125 ccw(c34.738,20.676)
  region net NetFB50_2: 35.275,12.535 35.275,13.155 ccw(c34.738,13.035) 34.738,13.585 ccw(c34.738,13.052) 34.725,13.585 ccw(c34.716,13.035) 34.175,13.135 33.575,13.135 ccw(c33.575,12.535) 32.975,12.535 ccw(c33.575,12.535) 33.575,11.935 34.675,11.935 ccw(c34.675,12.535)

## Silkscreen, mask and mechanical layers (free items; w line width, h text height)
Top Overlay:
  drawing of 3 lines, arcs and shapes, not listed
  text "SensWear" at 16.5,26.3 h3
  text "BOOT" at 36,25.2 h1
  text "UART" at 16.8,22.4 h1
  text "PWR" at 28.6,22.1 h1 r90
  text "SWD" at 23.3,10.9 h1 r90
  text "D_RST" at 35.8,7.467 h1
  text "TRST" at 22.7,6.4 h1 r90
  text "UART" at 24.7,6.1 h1
  text "SWD" at 31.2,6.1 h1
Bottom Overlay:
  text "Debug" at 40.541,25.819 h3
  text "1" at 16.85,20 h1 r180
  text "V2.R1" at 20.7,6 h1
Mechanical 1:
  the board outline again, w0.25
Top Assembly:
  lines w0.1: 14.7,17 43,17

## Dimensions
16,5.375 to 41,5.375 on Mechanical 13
41,30.375 to 41,5.375 on Mechanical 13

## Text inside footprints (layer, text, board x,y; h text height)
U50: Dimensions "*x*" at 23.783,17.286 h0.5 r180